# Altium PCB 节能组取电.PcbDoc
Units mil, origin at the board's own origin, x right, y up, seen from the top; angles counter-clockwise.
Board outline 3149.61 x 3149.61 mil, 2 copper layers (Top Layer, Bottom Layer); 38 components, 14 nets, 84 pads, 47 vias.
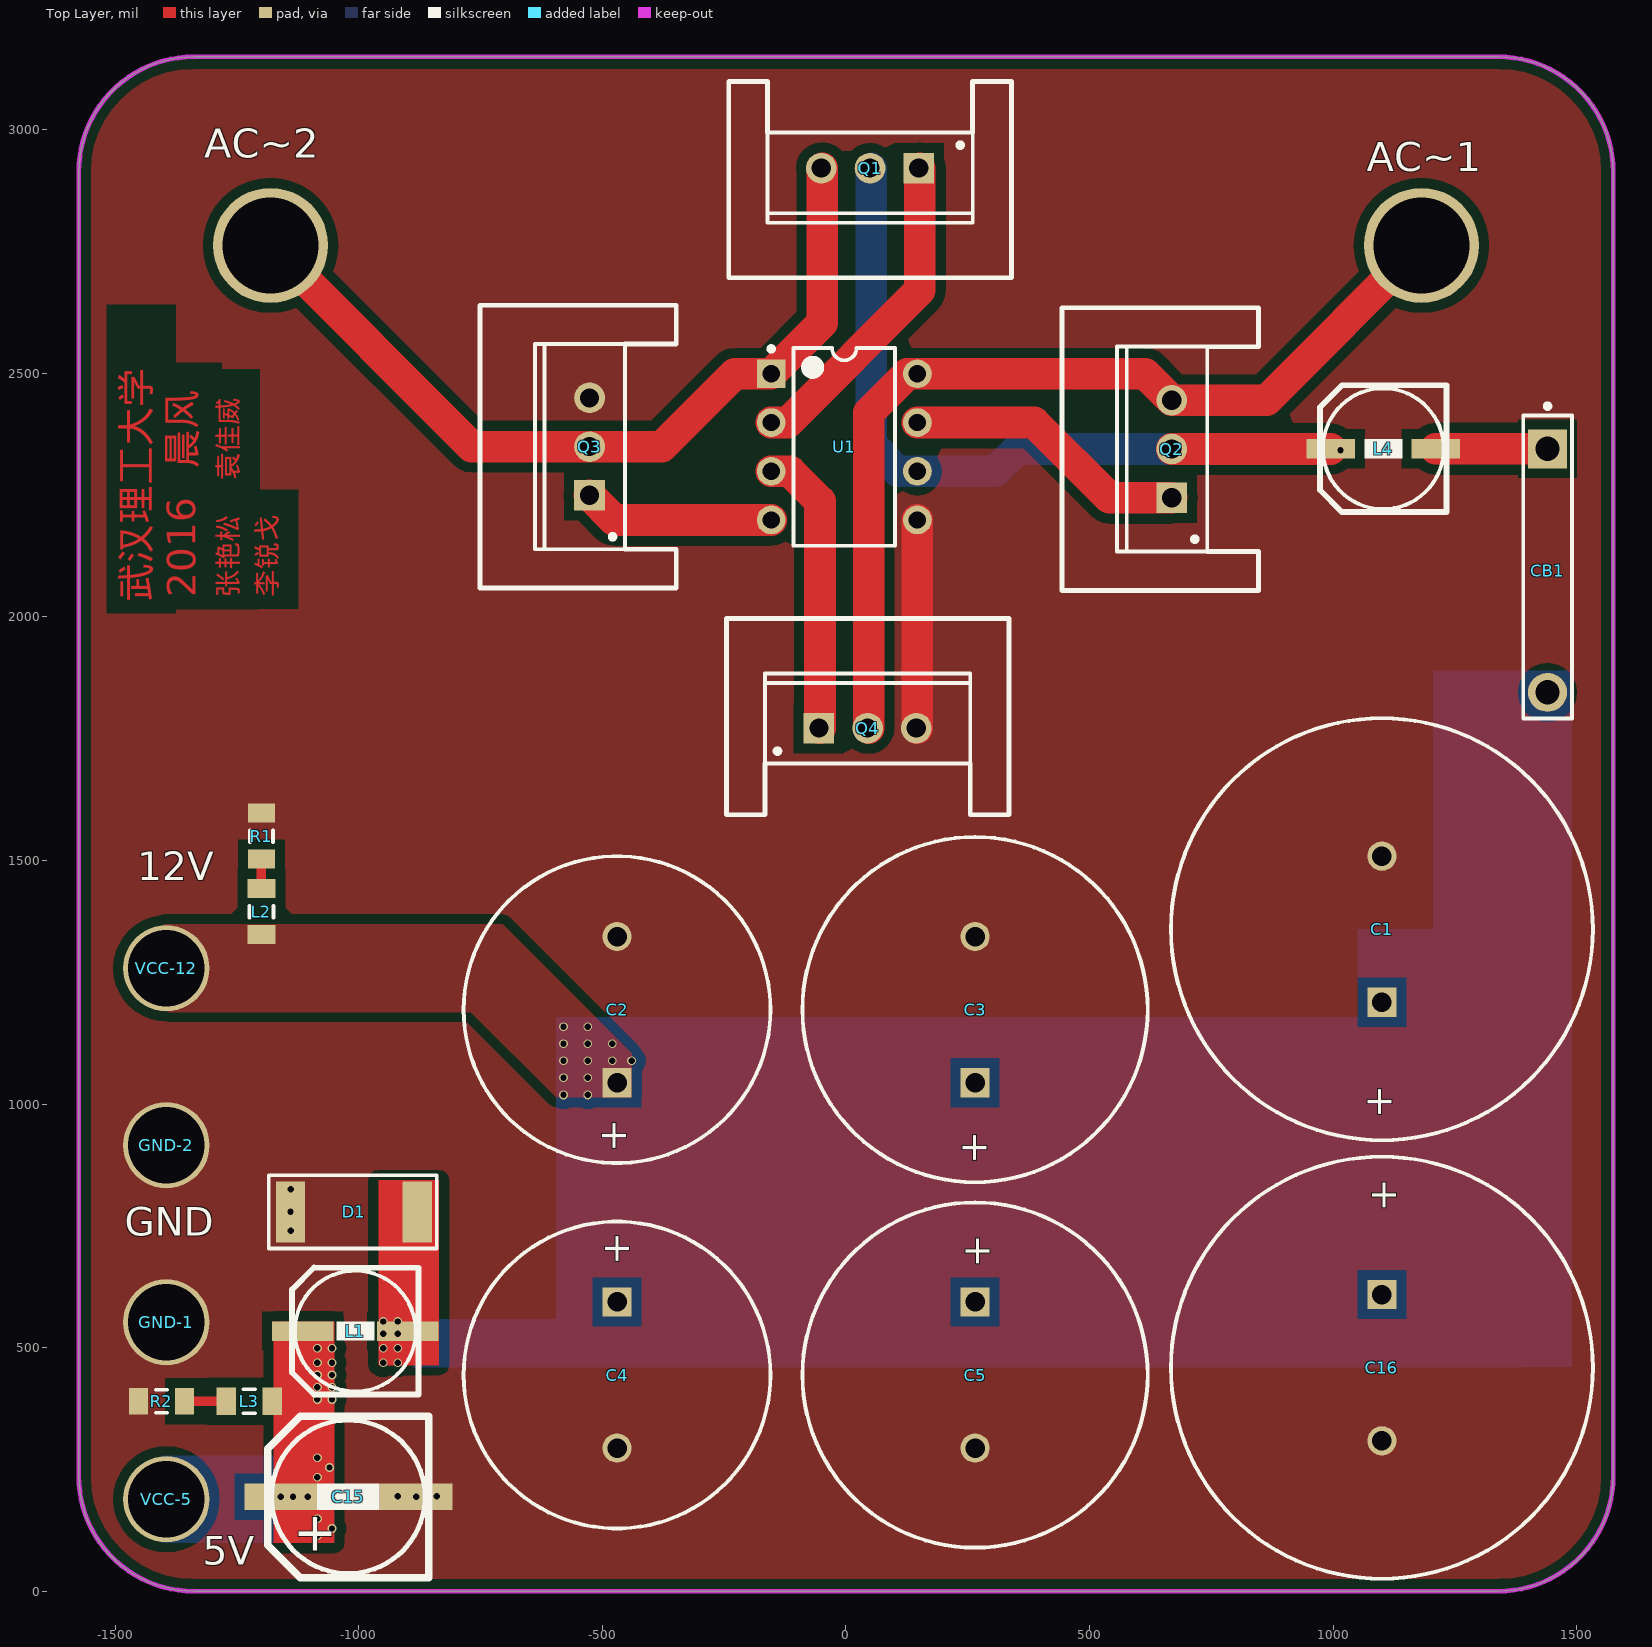
[diagram p0: Top Layer view]
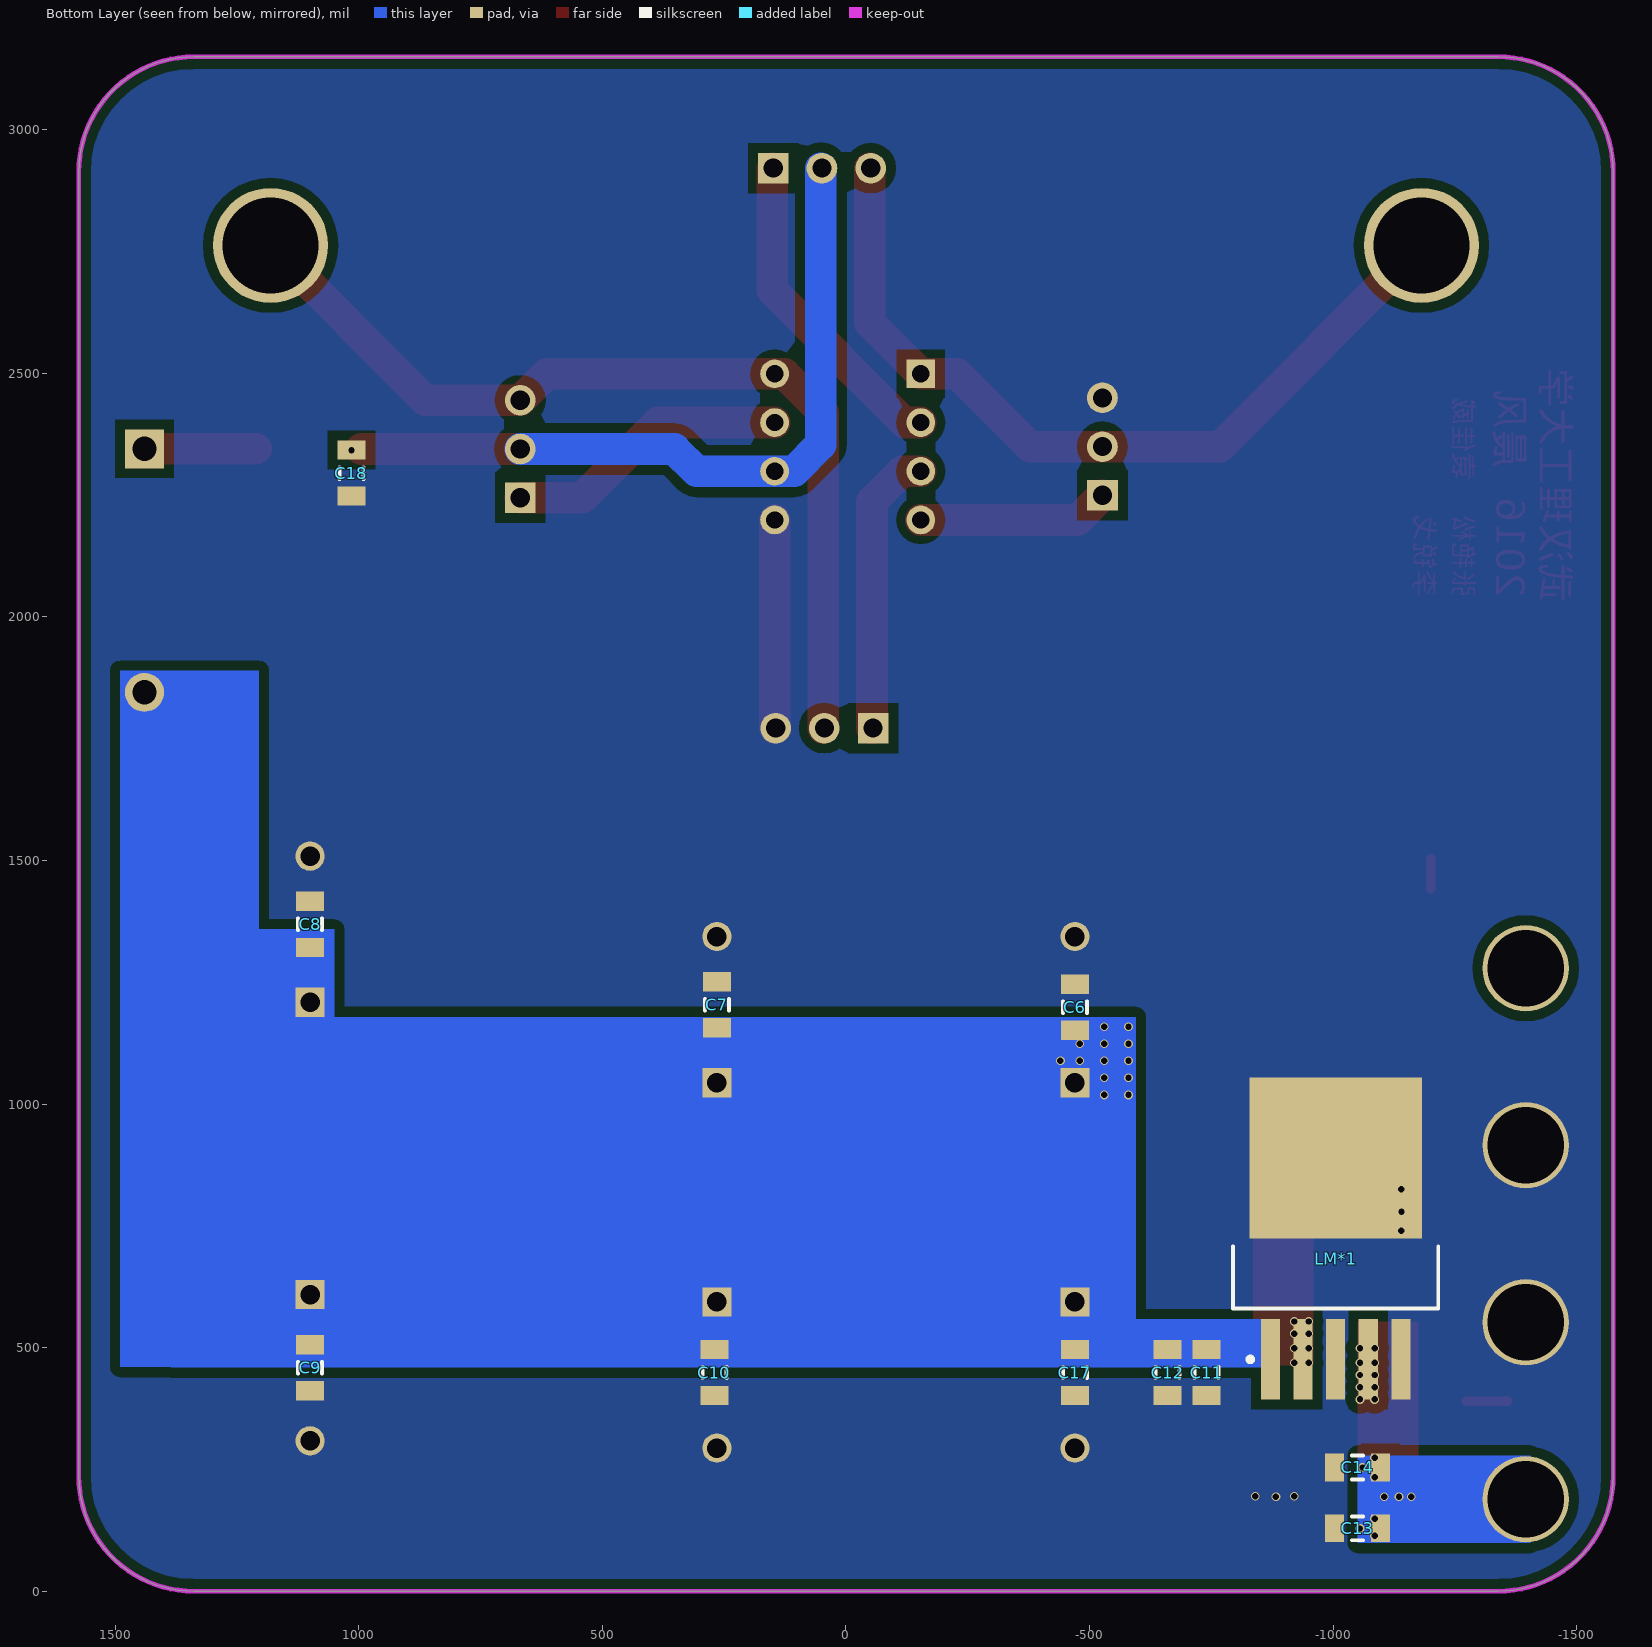
[diagram p1: Bottom Layer view, seen from below]
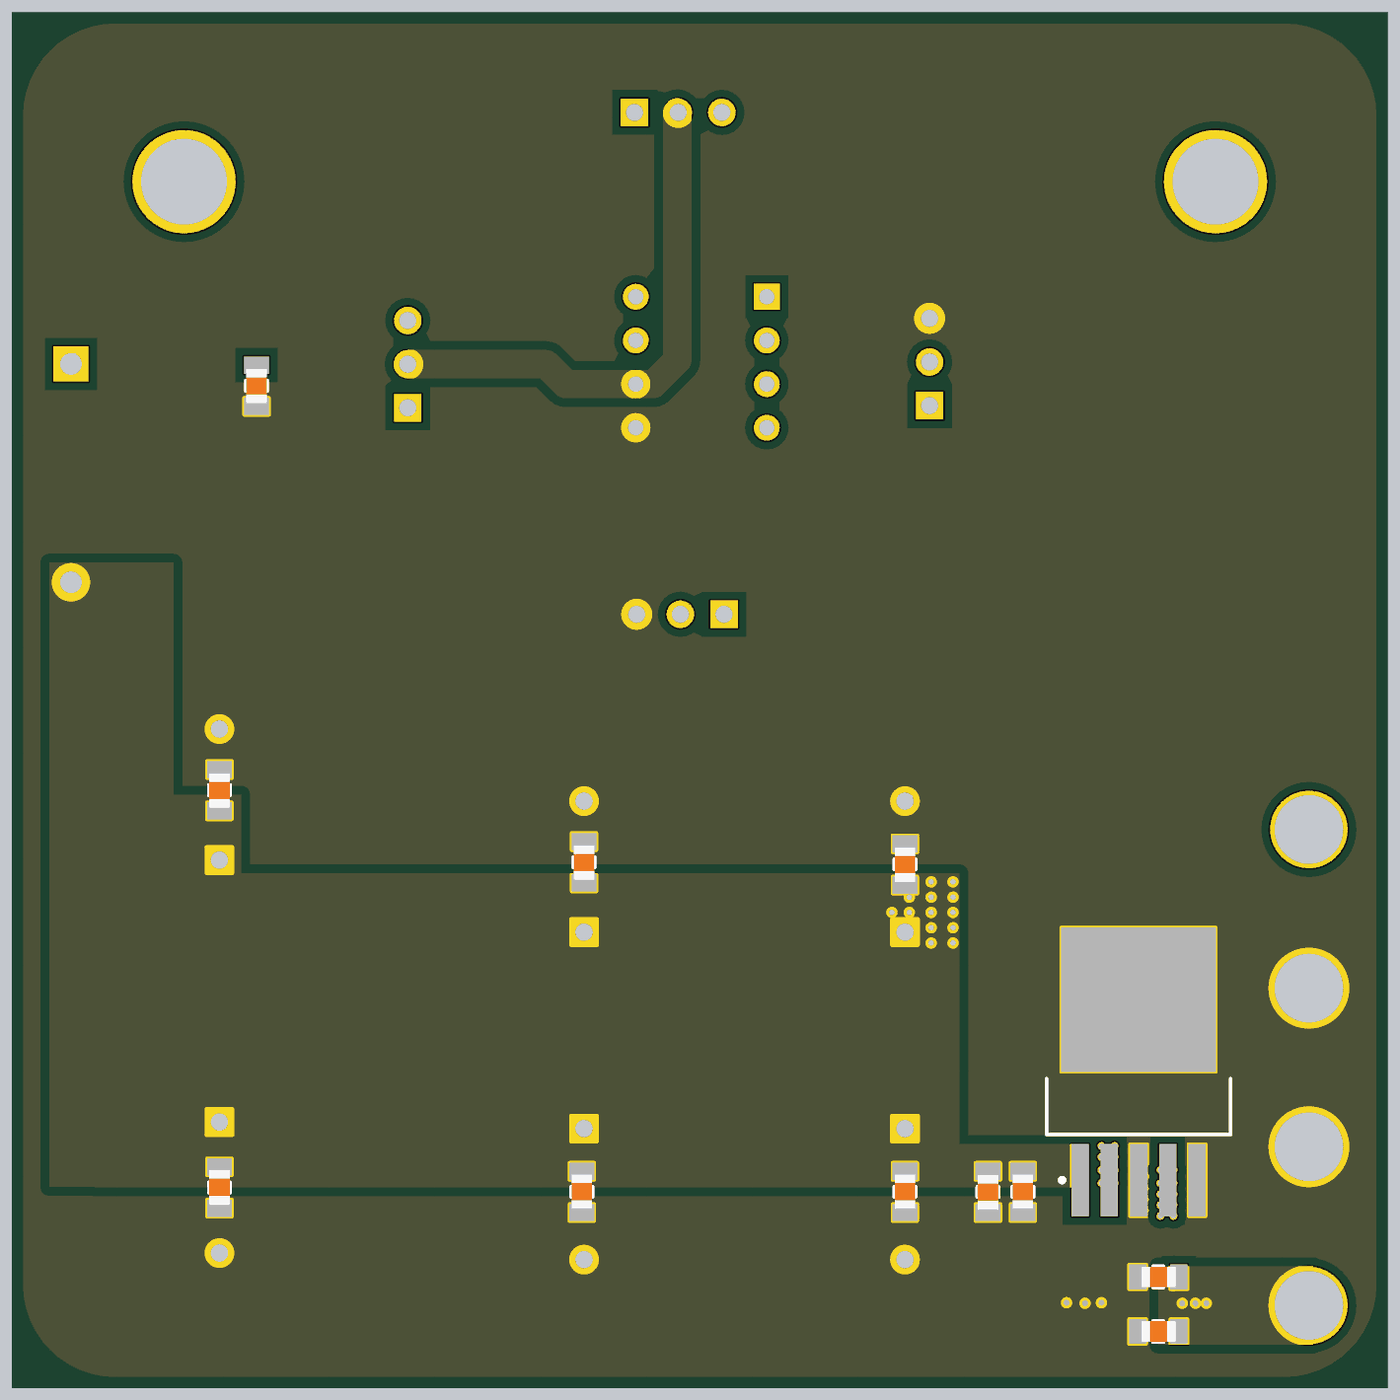
[diagram p2: 3D render of the assembled board from below, using the file's embedded part models]

## Layer stack, top to bottom
Top Layer: signal copper 1.4
Dielectric: dielectric 12.6, FR-4, Dk 4.8
Bottom Layer: signal copper 1.4

## Board outline
-1574.8,236.22 ccw(c-1338.58,236.22) -1338.58,0 1338.58,0 ccw(c1338.58,236.22) 1574.8,236.22 1574.8,2913.39 ccw(c1338.58,2913.39) 1338.58,3149.61 -1338.58,3149.61 ccw(c-1338.58,2913.39) -1574.8,2913.39

## Design rules (kind name [scope] priority, off if disabled: settings)
Clearance [All] p1: gap=20
PolygonConnect [All] p1: connectstyle=Direct reliefconductorwidth=10 reliefentries=4 polygonreliefangle="90 Angle" airgapwidth=10
RoutingVias [All] p1: holewidth=28 width=50 viastyle="Through Hole" minholewidth=28 minwidth=50 maxholewidth=28 maxwidth=50
SolderMaskExpansion [All] p1: expansion=4
Width [All] p1: maxlimit=80 minlimit=10 preferedwidth=40 minimp=50.000000 maximp=50.000000 favimp=50.000000
28 further rules are at their usual default settings.

## Components (designator, comment, footprint, x,y, rotation, side; value= is the part's Value field where it differs from the comment)
AC~1 "PIN" PIN#1 1181.1,2762.4 r0 top
AC~2 "PIN" PIN#1 -1181.1,2762.4 r0 top
C1 "Cap Pol1" RB7.6-15 1100,1358.82 r270 top
C2 "Cap Pol1" RB7.6-15 -470,1193.82 r270 top
C3 "Cap Pol1" RB7.6-15 265,1193.82 r270 top
C4 "Cap Pol1" RB7.6-15 -470,443.82 r90 top
C5 "Cap Pol1" RB7.6-15 265,443.82 r90 top
C6 "Cap" C2012 -470,1198.82 r270 bottom
C7 "Cap" C2012 265,1203.82 r270 bottom
C8 "Cap" C2012 1100,1368.82 r270 bottom
C9 "Cap" C2012 1100,458.82 r90 bottom
C10 "Cap" C2012 270,448.82 r90 bottom
C11 "Cap" C2012 -740,448.82 r90 bottom
C12 "680UF" c2012 -660,448.82 r270 bottom
C13 "Cap" C2012 -1050,129.13 r180 bottom
C14 "Cap" C2012 -1050,254.13 r180 bottom
C15 "220UF" SMD-EC-F8 -1160,193.82 r0 top
C16 "Cap Pol1" RB7.6-15 1100,458.82 r90 top
C17 "Cap" C2012 -470,448.82 r90 bottom
C18 "Cap Pol1" C2012 1015,2295 r270 bottom
CB1 "Circuit Breaker" SPST-2 1440,2245 r270 top
D1 "1SS355" SK54 -1010,778.82 r0 top
GND-1 "PIN" PIN#2 -1395,552.15 r0 top
GND-2 "PIN" PIN#2 -1395,915.49 r0 top
L1 "33uH" SMD-EC-F6.3#1 -1115,533.82 r0 top
L2 "LED" C2012 -1200,1395 r90 top
L3 "LED" C2012 -1225,390 r180 top
L4 "33uH" SMD-EC-F6.3#2 995,2345 r0 top
LM*1 "lm2596" lm2596 -1005,723.82 r90 bottom
Q1 "MOSFET-N" mos 74.37,2910.98 r270 top
Q2 "MOSFET-N" mos 658.66,2319.45 r180 top
Q3 "MOSFET-N" mos -536.34,2324.45 r180 top
Q4 "MOSFET-N" mos 19.37,1781.65 r90 top
R1 "Res" R2012 -1200,1550 r90 top
R2 "Res" R2012 -1405,390 r180 top
U1 "LT4320-DIP" DIP-8 -3.5,2348.82 r0 top
VCC-5 "PIN" PIN#2 -1395,188.82 r0 top
VCC-12 "PIN" PIN#2 -1395,1278.82 r90 top

## Footprints (in the part's own frame and the unit in brackets; to place one, negate y for a bottom-side part, rotate by r counter-clockwise, add the part's x,y. Pads: shape width x height; smd on the part's side, far side on the other; paste and mask are expansions set on the pad)
C2012 [mm] "Chip Capacitor, 2-Leads, Body 2.0x1.2mm, IPC Low Density"
  rect 1x1.45 smd: 1(-1.2,0) 2(1.2,0)
  silkscreen extent -0.3,-0.63 0.3,0.63, body extent -0.98,-0.6 1.02,0.6, height 0.5
c2012 [mm] "Chip Capacitor, 2-Leads, Body 2.0x1.2mm, IPC Low Density"
  rect 1x1.45 smd: 1(-1.2,0) 2(1.2,0)
  silkscreen extent -0.3,-0.63 0.3,0.63, body extent -0.98,-0.6 1.02,0.6, height 0.5
DIP-8 [mm] "DIP; 8 Leads; Row Spacing 7.62 mm; Pitch 2.54 mm"
  rect 1.5x1.5 hole 0.9: 1(-3.81,3.81)
  round 1.5 hole 0.9: 2(-3.81,1.27) 3(-3.81,-1.27) 4(-3.81,-3.81) 5(3.81,-3.81) 6(3.81,-1.27) 7(3.81,1.27) 8(3.81,3.81)
  silkscreen extent -3.93,-5.15 2.65,5.23, body extent -3.6,-5.15 3.6,5.15, height 5.08
lm2596 [mm]
  rect 4.2x1 smd: 1(-6.3,3.4) 2(-6.3,1.7) 3(-6.3,0) 4(-6.3,-1.7) 5(-6.3,-3.4)
  rect 8.4x9 smd: 6(4.2,0)
  silkscreen extent -6.42,-5.35 -0.4,5.35, body extent -3.65,-5.32 6,5.33, height 4.83
mos [mm]
  rect 1.6x1.6 hole 1: 1(-0.254,1.905)
  round 1.6 hole 1: 2(-0.254,-0.635) 3(-0.254,-3.175)
  silkscreen extent -2.1,-5.99 2.6,4.72, body extent -2.15,-6.04 2.65,4.77, height 19.3
PIN#1 [mm]
  round 6 hole 5: 1(0,0)
PIN#2 [mm]
  round 4.5 hole 4: 1(0,0)
R2012 [mm] "Chip Resistor, 2-Leads, Body 2.0x1.2mm, IPC Low Density"
  rect 1x1.4 smd: 1(-1.2,0) 2(1.2,0)
  silkscreen extent -0.3,-0.6 0.3,0.6, body extent -0.98,-0.6 1.02,0.6, height 0.5
RB7.6-15 [mil] "Polarized Capacitor (Radial); 2 Leads"
  rect 60x60 hole 40: 1(150,0)
  round 60 hole 40: 2(-150,0)
  silkscreen extent -433,-433 433,433
SK54 [mm]
  rect 1.52x3.18 smd: 1(-3.305,0) 2(3.305,0)
  silkscreen extent -4.44,-1.91 4.32,1.91
SMD-EC-F6.3#1 [mm]
  rect 3.2x1 smd: 1(0,0) 2(5.475,0)
  silkscreen extent -0.56,-3.31 6.04,3.31
SMD-EC-F6.3#2 [mm]
  rect 2.54x1 smd: 1(0,0) 2(5.475,0)
  silkscreen extent -0.56,-3.31 6.04,3.31
SMD-EC-F8 [mm]
  rect 3.8x1.4 smd: 1(0,0) 2(7.051,0)
  silkscreen extent -0.69,-4.22 7.71,4.2
SPST-2 [mil] "Switch; 2 Leads"
  rect 80x80 hole 50: 1(-100,0)
  round 80 hole 50: 2(400,0)
  silkscreen extent -192,-50 454,50

## Part data
C1 C2 C3 C4 C5 C16 C18: "Polarized Capacitor (Radial)"
C6 C7 C8 C9 C10 C11 C13 C14 C17: "Capacitor"
C12 C15: library part CAP+
D1: library part "Diode 1N4148", "High Conductance Fast Diode"
L1 L4: library part Inductor, "Inductor"
Q1 Q2 Q3 Q4: "N-Channel MOSFET"
R1 R2: "贴片电阻"

## Via types
v1: diameter 18, hole 13, Top Layer to Bottom Layer, 47 vias

## Nets (pads, with @x,y where several pads share a name; then routed paths per layer and width w, separated by ;. In a path a pad name is that pad's centre, name@x,y a point inside that pad or via, vN(x,y) a via of type N, cw(c..) or ccw(c..) an arc to the next point about the centre after c; other vN are vias at no path point)
5V: C13.2 C14.2 C15.1 L1.1 L3.1 LM*1.4 VCC-5.1
  other v1: -1085,113.82 -1055,128.82 -1085,148.82 -1160,193.82 -1135,193.82 -1105,193.82 -1085,233.82 -1060,253.82 -1085,273.82 -1085,393.82 -1055,393.82 -1085,418.82 -1055,418.82 -1085,443.82 -1055,443.82 -1085,468.82 -1055,468.82 -1085,498.82 -1055,498.82
12V: C1.1 C2.1 C3.1 C4.1 C5.1 C6.2 C7.2 C8.2 C9.2 C10.2 C11.2 C12.1 C16.1 C17.2 CB1.2 L2.1 LM*1.1 VCC-12.1
  other v1: -580,1018.82 -530,1018.82 -580,1053.82 -530,1053.82 -580,1088.82 -530,1088.82 -480,1088.82 -440,1088.82 -580,1123.82 -530,1123.82 -480,1123.82 -580,1158.82 -530,1158.82
AC~1: AC~1.1 Q2.3 Q4.2 U1.8 | length 1969.3
  Top Layer w65: Q4.2@46.5,1771.65 46.5,2419.03 126.29,2498.82 U1.8 614.29,2498.82 Q2.3 863.15,2444.45 AC~1.1
AC~2: AC~2.1 Q1.3 Q3.2 U1.1 | length 1726.2
  Top Layer w65: AC~2.1 -768.15,2349.45 Q3.2 -377.87,2349.45 -228.5,2498.82 U1.1 -48.5,2603.82 Q1.3@-48.5,2920.98
GND: C1.2 C2.2 C3.2 C4.2 C5.2 C6.1 C7.1 C8.1 C9.1 C10.1 C11.1 C12.2 C13.1 C14.1 C15.2 C16.2 C17.1 C18.2 D1.1 GND-1.1 GND-2.1 LM*1.3 LM*1.5 LM*1.6 Q3.3 Q4.3 R1.2 R2.2 U1.5 | length 427.2
  Top Layer w65: Q4.3@146.5,1771.65 U1.5
  other v1: -882.41,193.82 -920,195 -840,195 -1140,740 -1140.12,778.82 -1140,825
NetCB1_1: CB1.1 L4.2 | length 229.5
  Top Layer w65: L4.2 CB1.1
NetD1_2: D1.2 L1.2 LM*1.2
  other v1: -950,468.82 -920,468.82 -950,498.82 -920,498.82 -950,528.82 -920,528.82 -950,553.82 -920,553.82
NetL2_2: L2.2 R1.1 | length 60.5
  Top Layer w20: L2.2 R1.1
NetL3_2: L3.2 R2.1 | length 84
  Top Layer w20: R2.1 L3.2@-1273.74,390
NetQ1_1: Q1.1 U1.2 | length 668.1
  Top Layer w65: U1.2 -120,2398.82 151.5,2670.32 Q1.1@151.5,2920.98
NetQ2_1: Q2.1 U1.7 | length 586.1
  Top Layer w65: U1.7 386.5,2398.82 540.87,2244.45 Q2.1
NetQ3_1: Q3.1 U1.4 | length 393.8
  Top Layer w65: Q3.1 -475.71,2198.82 U1.4
NetQ4_1: Q4.1 U1.3 | length 591.1
  Top Layer w65: U1.3 -115,2298.82 -53.5,2237.32 Q4.1@-53.5,1771.65
VCC: C18.1 L4.1 Q1.2 Q2.2 U1.6 | length 1551.8
  Top Layer w65: Q2.2 L4.1@994.45,2344.45
  Bottom Layer w65: Q1.2@51.5,2920.98 51.5,2353.82 106.5,2298.82 U1.6 306.5,2298.82 352.13,2344.45 Q2.2
  other v1: 1015,2342.24

## Polygon pours and split planes (outlines as drawn)
GND on Top Layer "Top Layer-GND" (solid, remove dead copper, pour order 6): -1574.8,2815 -1574.8,3149.61 -1255,3149.61 1574.8,3149.61 1574.8,1470 1574.8,0 985,0 -1574.8,0 -1574.8,630
12V on Top Layer "Top Layer-GND" (solid, remove dead copper, pour order 2): -1400,1368.82 -705,1368.82 -510,1173.82 -440,1103.82 -440,1013.82 -500,1013.82 -595,1013.82 -770,1188.82 -1390,1188.82 -1395,1193.82 -1400,1193.82
GND on Bottom Layer "Top Layer-GND" (solid, remove dead copper, pour order 4): -1574.8,3149.61 -1574.8,0 590,0 1574.8,0 1574.8,3108.97 1574.8,3149.61 -1575,3149.61

## Keep-outs
Keep-Out Layer:
  the board outline again, w10

## Other copper
Top Layer:
  rectangle net 5V: -1175,98.82 -1050,553.82
  rectangle net NetD1_2: -960,463.82 -835,843.82
  text "晨风" at -1315,2305 h100 r90
  text "袁佳威" at -1235,2280 h70 r90
  text "2016" at -1315,2040 h100 r90.25
  text "张艳松" at -1235,2040 h70 r90
  text "李锐戈" at -1155,2040 h70 r90
  text "武汉理工大学" at -1410,2030 h100 r90
Bottom Layer:
  rectangle net 5V: -1405,98.82 -1050,278.82
  rectangle net 12V: -890,458.82 -450,558.82
  rectangle net 12V: 1050,1153.82 1275,1358.82
  rectangle net 12V: 1205,460 1490,1890
  rectangle net 12V: -595,458.82 1385,1178.82

## Silkscreen, mask and mechanical layers (free items; w line width, h text height)
Top Overlay:
  lines w10: -453.5,2138.82 -348.5,2138.82 -348.5,2059.45 -751.34,2059.45 -751.34,2639.45 -348.5,2639.45 -348.5,2560.08 -453.5,2560.08 ; -166.26,1698.82 -166.26,1593.82 -245.63,1593.82 -245.63,1996.65 334.37,1996.65 334.37,1698.82 334.37,1593.82 255,1593.82 255,1698.82 ; -161.26,2993.82 -161.26,3098.82 -240.63,3098.82 -240.63,2695.98 339.37,2695.98 339.37,3098.82 260,3098.82 260,2993.82 ; 741.5,2133.82 846.5,2133.82 846.5,2054.45 443.66,2054.45 443.66,2634.45 846.5,2634.45 846.5,2554.45 741.5,2554.45
  text "12V" at -1455,1440 h100
  text "GND" at -1480,710 h100
  text "5V" at -1320,35 h100
Mechanical 15:
  lines w10: -725,1043.82 1230,1043.82 ; -455,293.82 1230,293.82 ; 0,-551.18 0,3385.83

## Text inside footprints (layer, text, board x,y; h text height)
C1: Top Overlay "+" at 1070.99,1038.67 h59.06 r270
C2: Top Overlay "+" at -500,968.82 h59.06 r270
C3: Top Overlay "+" at 240,943.82 h59.06 r270
C4: Top Overlay "+" at -445,668.82 h59.06 r90
C5: Top Overlay "+" at 295,663.82 h59.06 r90
C15: Top Overlay "+" at -1134.79,82.89 h78.74
C16: Top Overlay "+" at 1129.01,778.97 h59.06 r90